# EAGLE board rx_sensor (EAGLE 6.5.0)
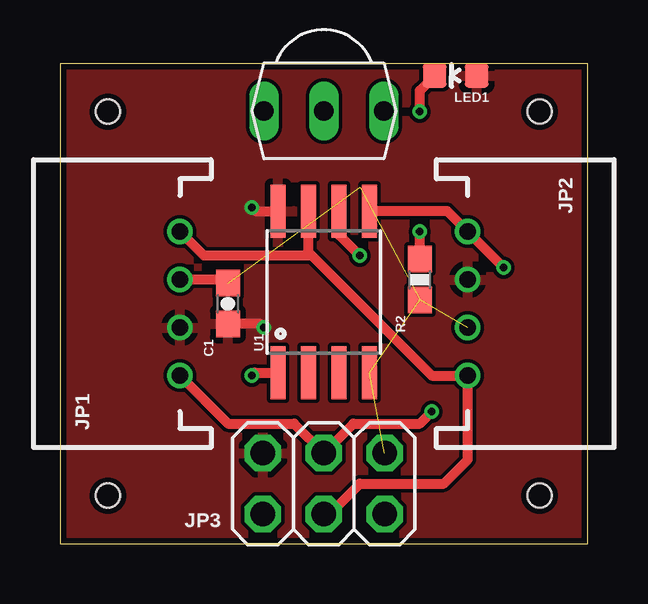
[diagram p0: board, top side]
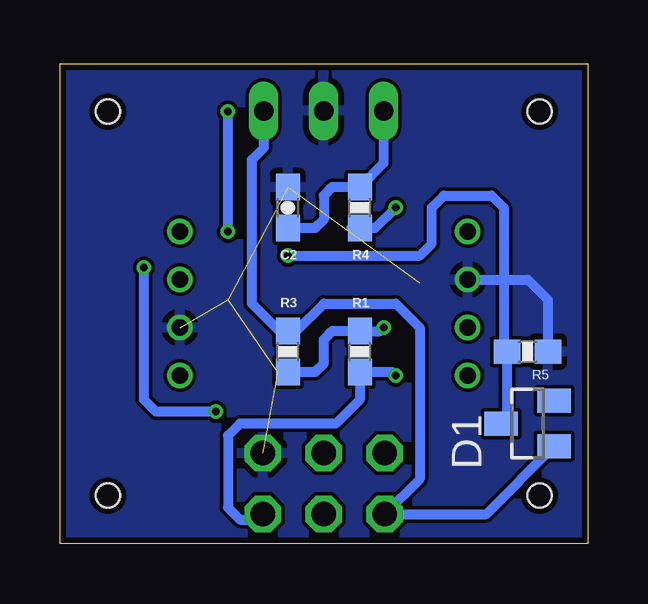
[diagram p1: board, bottom side, seen from below]

Size 22 x 20 mm. Coordinates in mm from the lower left corner, seen from the top.
Outline: 0,0 22,0 22,20 0,20 0,0
Copper layers (1*2*15*16): Top 0.035mm / dielectric 0.2mm / layer 2 0.0175mm / dielectric 1.1mm / layer 15 0.0175mm / dielectric 0.2mm / Bottom 0.035mm
Design rules "SeeedStudio_DRU_no_angle_20130527": minimum track width 6mil, minimum drill 12mil, track to track 6mil, track to pad 6mil, pad to pad 6mil, via to via 6mil, smd to smd 0mil, copper to edge 10mil, drill to drill 10mil, minimum pad ring 6mil, minimum via ring 6mil, stop-mask expansion 2mil, vias tented up to drill 25mil, thermal gap 10mil
Holes 1 mm at 2,18 20,18 20,2 2,2

## Footprints (pad centres in the part's own frame; a part is rotated, then mirrored left to right if it is on the bottom)
0603-CAP = smd 1.1 x 1: 1 -0.85,0; 2 0.85,0
SOT23 = smd 1 x 1.4: 1 -0.95,-1.1; 2 0.95,-1.1; 3 0,1.1
JST-4-PTH = drill 0.7: 1 -3,-5; 2 -1,-5; 3 1,-5; 4 3,-5
2X03 = drill 1.016 octagon: 1 -2.54,-1.27; 2 -2.54,1.27; 3 0,-1.27; 4 0,1.27; 5 2.54,-1.27; 6 2.54,1.27
LED-0603 = smd 1 x 1: A 0,-0.877; C 0,0.877
0603-RES = smd 1.1 x 1: 1 -0.85,0; 2 0.85,0
SO08-EIAJ = smd 0.61 x 2.21: 1 -1.905,-3.378; 2 -0.635,-3.378; 3 0.635,-3.378; 4 1.905,-3.378; 5 1.905,3.353; 6 0.635,3.353; 7 -0.635,3.353; 8 -1.905,3.353
TSOP18XX = drill 0.813 long: GND -0.001,-0.027; OUT -2.501,-0.027; VCC 2.499,-0.027

## Placement (x,y rotation side)
C1  [0603-CAP]  7,10 270 top
C2  [0603-CAP]  12.5,14 90 bottom
D1  BAT54  [SOT23]  2.5,5 90 bottom
JP1  [JST-4-PTH]  0,10 90 top
JP2  [JST-4-PTH]  22,10 270 top
JP3  [2X03]  11,2.5 0 top
LED1  [LED-0603]  16.5,19.5 90 top
R1  [0603-RES]  9.5,8 270 bottom
R2  [0603-RES]  15,11 90 top
R3  [0603-RES]  12.5,8 270 bottom
R4  [0603-RES]  9.5,14 90 bottom
R5  [0603-RES]  2.5,8 180 bottom
U1  Tiny45-20-SMT  [SO08-EIAJ]  11,10.5 0 top
U$1  TSOP4836  [TSOP18XX]  11,18 180 top

## Library data of the parts
C1 C2 = SparkFun-Capacitors
D1 = diode
JP1 JP2 = SparkFun-Connectors; SKU: PRT-09916
JP3 = pinhead
LED1 = SparkFun-LED
R1-R5 = SparkFun-Resistors
U1 = SparkFun-DigitalIC; PROD_ID: IC-08922
U$1 = tsop-1

## Nets
GND: C1.1 C2.2 JP1.3 JP2.3 JP3.6 R2.1 R5.1 U1.4 U$1.GND
MISO: D1.1 JP3.1 R3.1 U$1.OUT
N$1: LED1.C R2.2
N$2: C2.1 R4.2 U$1.VCC
N$8: D1.3 R5.2 U1.6
RST: JP3.5 R1.2 U1.1
SCL: JP1.4 JP2.4 JP3.3 U1.7
SDA/MOSI: JP1.1 JP2.1 JP3.4 U1.5
VCC: C1.2 JP1.2 JP2.2 JP3.2 LED1.A R1.1 R3.2 R4.1 U1.8

## Tracks (layer width: path | path; a pad name or v marks a point on that pad's centre or on a via)
GND  (5 unrouted)
  Top 0.406: C1.1 6.85,11 JP1.3
  Bottom 0.406: JP1.3 2.5,11 1.65,10.15 R5.1
  pour Bottom: 0,0 22,0 22,20 0,20
MISO
  Bottom 0.406: D1.1 4.22,1.23 JP3.1 7,2.69 7,9 8,10 11,10 12.15,8.85 R3.1 12.85,8.85 14,10 14,16 13.5,16.5 U$1.OUT
N$1  (via drill 0.3)
  Top 0.406: R2.2 v15,13 | v15,18 15,18.88 LED1.C
  Bottom 0.406: v15,13 v15,18
N$2
  Bottom 0.406: U$1.VCC 8.5,15.85 R4.2 10.65,14.85 11,14.5 11,13.5 11.35,13.15 C2.1
N$8  (via drill 0.3)
  Top 0.406: U1.6 11.63,12.87 v12.5,12
  Bottom 0.406: D1.3 3.35,5.25 R5.2 3.5,8.15 3.5,14 4,14.5 6,14.5 6.5,14 6.5,12.5 7,12 v12.5,12
RST  (via drill 0.3)
  Top 0.406: v8,7 8.12,7.12 U1.1
  Bottom 0.406: v8,7 8.15,7.15 R1.2 9.5,6 10.5,5 14.5,5 15,4.5 15,1.5 14.5,1 13.77,1 JP3.5
SCL
  Top 0.406: JP3.3 11.23,1.23 12.5,2.5 16,2.5 17,3.5 JP2.4 15.5,7 10.5,12 | 10.5,12 6,12 JP1.4 | 10.5,12 10.37,12.13 U1.7
SDA/MOSI  (via drill 0.3)
  Top 0.406: U1.5 16.15,13.85 JP2.1 v18.5,11.5 | JP1.1 7,5 9.77,5 JP3.4 12.23,5 15,5 v15.5,5.5
  Bottom 0.406: v15.5,5.5 18,5.5 18.5,6 v18.5,11.5
VCC  (via drill 0.3)
  Top 0.406: v8,14 8.15,13.85 U1.8 | v8.5,9 8.35,9.15 C1.2
  Bottom 0.406: 9.85,13.15 R4.1 8.85,13.15 v8,14 | R3.2 11.35,7.15 11,7.5 11,8.5 10.65,8.85 R1.1 8.65,8.85 v8.5,9
  pour Top: 0,20 22,20 22,0 0,0